# Altium PCB PCB1.PcbDoc
Units mil, origin at the board's own origin, x right, y up, seen from the top; angles counter-clockwise.
Board outline 1560 x 670 mil, 2 copper layers (Top Layer, Bottom Layer); 12 components, 9 nets, 33 pads, 3 vias.
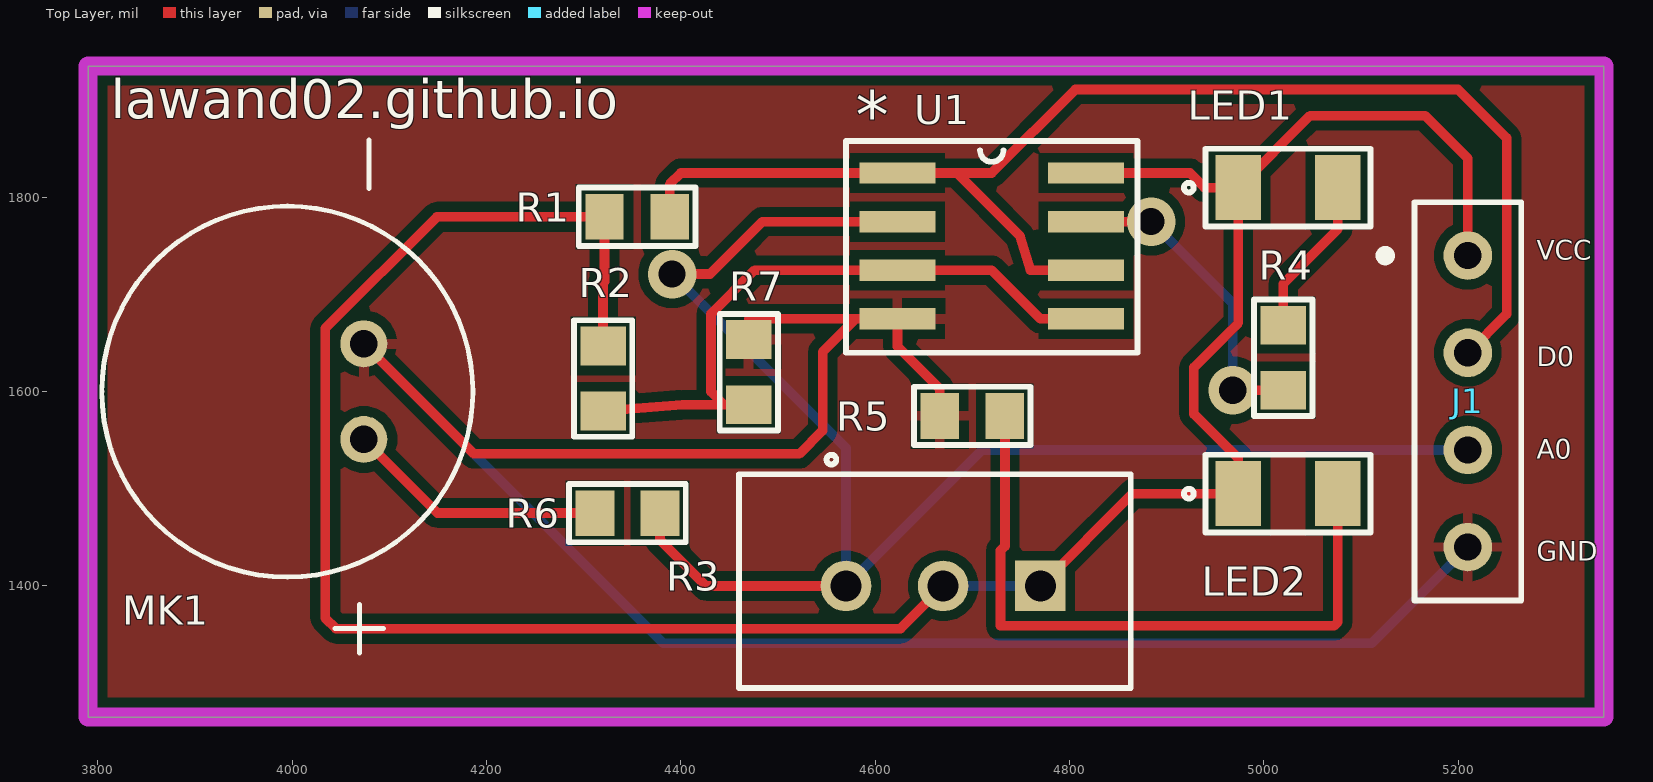
[diagram p0: Top Layer view]
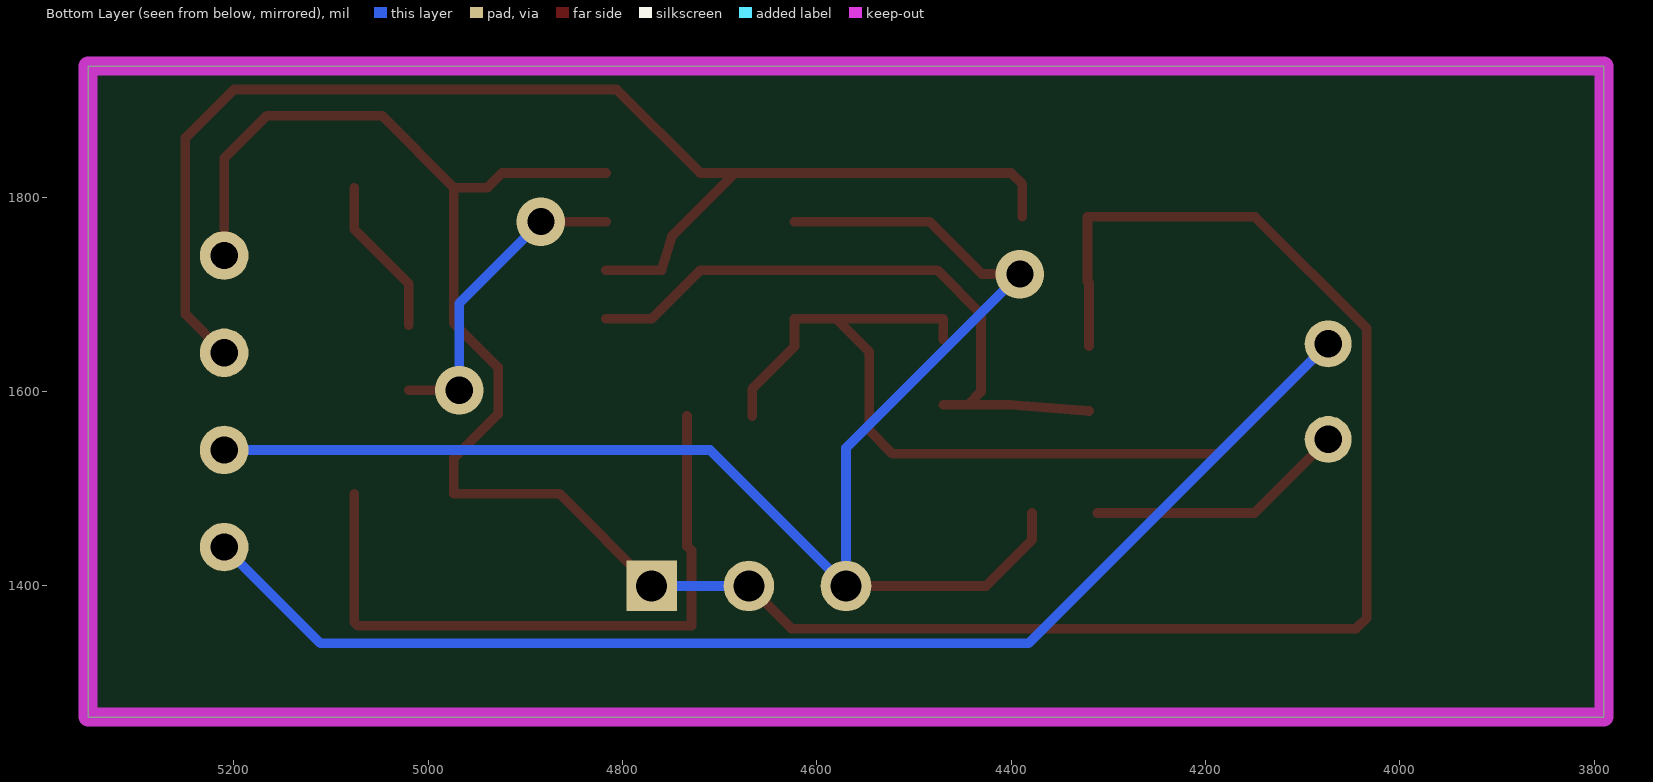
[diagram p1: Bottom Layer view, seen from below]
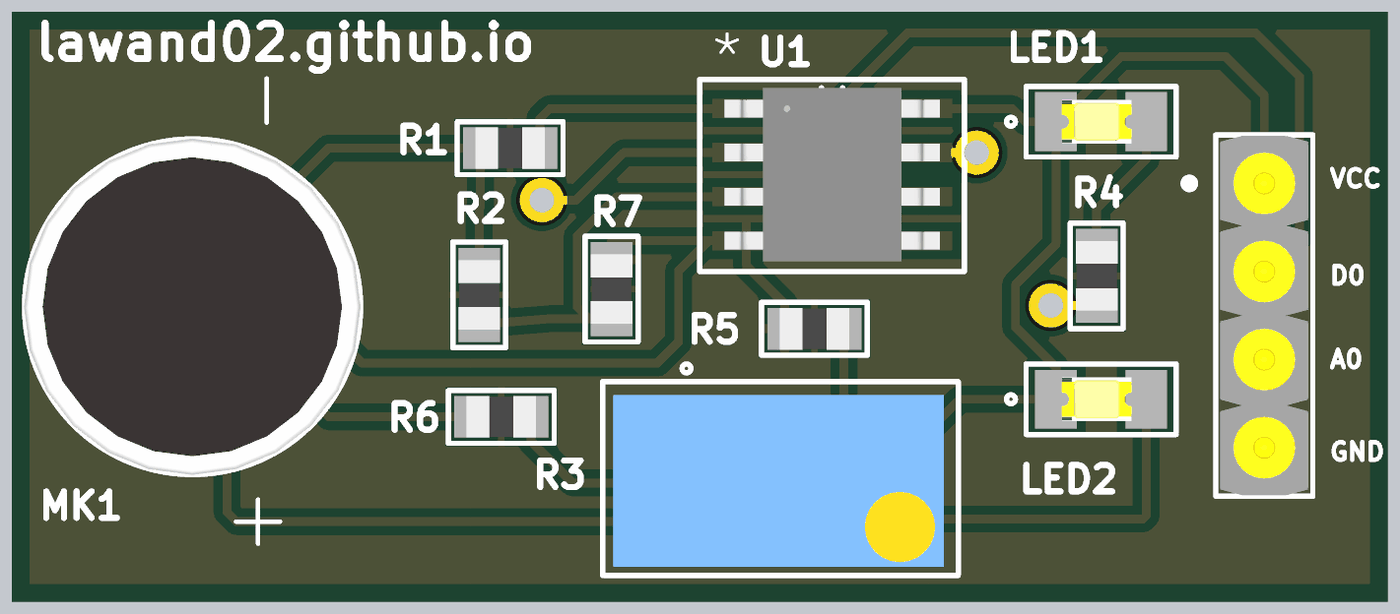
[diagram p2: 3D render of the assembled board from above, using the file's embedded part models]

## Layer stack, top to bottom
Top Solder: solder mask 0.4, Solder Resist, Dk 3.5
Top Layer: signal copper 1.4
Dielectric 1: dielectric 12.6, FR-4, Dk 4.8
Bottom Layer: signal copper 1.4
Bottom Solder: solder mask 0.4, Solder Resist, Dk 3.5

## Board outline
3790,1265 5350,1265 5350,1935 3790,1935

## Design rules (kind name [scope] priority, off if disabled: settings)
Clearance [All] p1: gap=10 ignorepadtopadclearanceinfootprint=FALSE except(0: Arc-Hole Track-Hole SMDPad-Hole THPad-Hole Via-Hole Fill-Hole Poly-Hole Region-Hole Text-Hole)
PolygonConnect [All] p1: connectstyle=Relief reliefconductorwidth=10 reliefentries=4 polygonreliefangle="90 Angle" airgapwidth=10
RoutingVias [All] p1: holewidth=28 width=50 viastyle="Through Hole" minholewidth=28 minwidth=50 maxholewidth=28 maxwidth=50
SolderMaskExpansion [All] p1: expansion=4 istentingtop=FALSE
Width [All] p1: maxlimit=10 minlimit=10 preferedwidth=10
30 further rules are at their usual default settings.

## Components (designator, comment, footprint, x,y, rotation, side; value= is the part's Value field where it differs from the comment)
J1 "TS-104-T-A" TS-104-T-A 5210,1590 r270 top
LED1 "SIG LED" CMD15-21VRD/TR8 5025,1810 r0 top
LED2 "PWR LED" CMD15-21VRD/TR8 5025,1495 r0 top
MK1 "AOM-6738P-R" AOM-6738P-R 3995,1600 r270 top
R1 "10K" ERJ-6GEYJ103V 4355,1780 r180 top
R2 "100K" RC0805JR-07100KL 4320,1613.5 r90 top
R3 "10K" 3296W-1-103LF 4770,1400 r180 top
R4 "10K" ERJ-6GEYJ103V 5020,1635 r90 top
R5 "10K" ERJ-6GEYJ103V 4700,1575 r0 top
R6 "150R" RC0805JR-07150RL 4345,1475 r0 top
R7 "100K" RC0805JR-07100KL 4470,1620 r270 top
U1 "LM393DR" LM393DR 4720,1750 r0 top

## Footprints (in the part's own frame and the unit in brackets; to place one, negate y for a bottom-side part, rotate by r counter-clockwise, add the part's x,y. Pads: shape width x height; smd on the part's side, far side on the other; paste and mask are expansions set on the pad)
3296W-1-103LF [mil]
  round 52 / inner round 60 / far side round 52 hole 32 paste-26 mask+0: 1(200,0) 2(100,0)
  rect 52x52 / inner round 60 / far side rect 52x52 hole 32 paste-26 mask+0: 3(0,0)
  silkscreen extent -93,-135 310,105, body extent -77,-100 298,95, height 378
AOM-6738P-R [mm]
  round 1.228 hole 0.72: N(-1.25,2) P(1.25,2)
  silkscreen extent -6.58,-4.85 6.83,4.85, body extent -4.85,-4.86 4.85,4.84, height 6.97
CMD15-21VRD/TR8 [mil]
  rect 47x67 smd paste+0 mask+0: 1(-51.18,0) 2(51.18,0)
  silkscreen extent -107,-40 85,40, body extent -45,-25 35,25, height 43
ERJ-6GEYJ103V [mm]
  rect 1.006x1.2 smd paste+0 mask+0: 1(-0.853,0) 2(0.853,0)
  silkscreen extent -1.52,-0.76 1.52,0.76, body extent -1,-0.6 1,0.6, height 0.71
LM393DR [mil]
  rect 78x22 smd paste-39 mask-39: 1(-97,75) 2(-97,25) 3(-97,-25) 4(-97,-75) 5(97,-75) 6(97,-25) 7(97,25) 8(97,75)
  silkscreen extent -150,-110 150,108, body extent -122,-99 122,99, height 69
RC0805JR-07100KL [mil]
  rect 40x47 smd paste+0 mask+0: 1(-33.5,0) 2(33.5,0)
  silkscreen extent -60,-30 60,30, body extent -39,-24 39,24, height 28
RC0805JR-07150RL [mil]
  rect 40x47 smd paste+0 mask+0: 1(-33.5,0) 2(33.5,0)
  silkscreen extent -60,-30 60,30, body extent -39,-24 39,24, height 28
TS-104-T-A [mil]
  round 50 / inner round 60 / far side round 50 hole 28 paste-25 mask+0: 1(-150,0) 2(-50,0) 3(50,0) 4(150,0)
  silkscreen extent -205,-90 205,55, body extent -204,-50 204,50, height 327

## Part data
J1: "CONN HEADER VERT 4POS 2.54MM", Mfr_Name="Samtec Inc", RefDes=RefDes, Type=Type
LED1 LED2: library part CMD15-21VRDTR8, "Red LED Indication - Discrete 1.7V 1206 (3216 Metric)", P/N=CMD15-21VRD/TR8
MK1: "30 Hz ~ 15 kHz Analog Microphone Electret Condenser 1.5 V ~ 10 V Omnidirectional (-38dB ±3dB) PC Pins", P/N=AOM-6738P-R
R1 R4 R5: library part ERJ-6GEYJ103V, "10 kOhms ±5% 0.125W, 1/8W Chip Resistor 0805 (2012 Metric) Automotive AEC-Q200 Thick Film", P/N=ERJ-6GEYJ103V
R2 R7: library part RC0805JR-07100KL, "100 kOhms ±5% 0.125W, 1/8W Chip Resistor 0805 (2012 Metric) Moisture Resistant Thick Film", P/N=RC0805JR-07100KL
R3: library part 3296W-1-103LF, "10 kOhms 0.5W, 1/2W PC Pins Through Hole Trimmer Potentiometer Cermet 25.0 Turn Top Adjustment", P/N=3296W-1-103LF
R6: library part RC0805JR-07150RL, "150 Ohms ±5% 0.125W, 1/8W Chip Resistor 0805 (2012 Metric) Moisture Resistant Thick Film", P/N=RC0805JR-07150RL
U1: "IC COMPARATOR 2 DIFF 8SOIC", P/N=LM393DR

## Via types
v1: diameter 50, hole 28, Top Layer to Bottom Layer, 3 vias

## Nets (pads, with @x,y where several pads share a name; then routed paths per layer and width w, separated by ;. In a path a pad name is that pad's centre, name@x,y a point inside that pad or via, vN(x,y) a via of type N, cw(c..) or ccw(c..) an arc to the next point about the centre after c; other vN are vias at no path point)
GND: J1.4 MK1.N R5.1 R7.1 U1.4 | length 2255.6
  Top Layer w10: MK1.N 4186.95,1536 4522,1536 4546,1560 4546,1641 4580,1675 ; R7.1 4470,1675 4580,1675 ; R5.1 4666.43,1603 4623,1646.43 U1.4 4580,1675
  Bottom Layer w10: MK1.N 4381.95,1341 5111,1341 J1.4
NetJ1_1: J1.1 LED1.1 LED2.1 R1.2 R2.2 R3.2 R3.3 U1.8 | length 2669.6
  Top Layer w10: R2.2 4320,1712 4321.43,1713.43 R1.2 4149,1780 4034,1665 4034,1367 4045,1356 4626,1356 R3.2 ; R3.3 4865,1495 LED2.1 4973.82,1531.18 4928,1577 4928,1625.04 4973.82,1670.86 LED1.1 ; U1.8 4924,1825 4939,1810 LED1.1 ; J1.1 5210,1840 5166,1884 5047.82,1884 LED1.1
  Bottom Layer w10: R3.2 R3.3
NetJ1_2: J1.2 R1.1 U1.1 U1.6 | length 1379.2
  Top Layer w10: R1.1 4388.57,1813.57 4400,1825 U1.1 4684,1825 ; U1.6 4760,1725 4749,1760 4684,1825 ; J1.2 5250,1680 5250,1861 5200,1911 4806,1911 4720,1825 4684,1825
NetJ1_3: J1.3 R3.1 R6.2 U1.2 | length 1586.2
  Top Layer w10: R6.2 4378.5,1447.5 4426,1400 R3.1 ; v1(4391,1721) 4430,1721 4484,1775 U1.2
  Bottom Layer w10: v1(4391,1721) 4570,1542 R3.1 4710,1540 J1.3
NetLED1_2: LED1.2 R4.2 | length 164.7
  Top Layer w10: R4.2 5020,1711 5076.18,1767.18 LED1.2
NetLED2_2: LED2.2 R5.2 | length 698.7
  Top Layer w10: R5.2 4733.57,1441 4729,1436.43 4729,1359 5072.18,1359 5076.18,1363 LED2.2
NetMK1_P: MK1.P R6.1 | length 269.2
  Top Layer w10: MK1.P 4149.53,1475 R6.1
NetR2_1: R2.1 R7.2 U1.3 U1.5 | length 674.7
  Top Layer w10: R2.1 4401.5,1586.5 4444.5,1586.5 ; R7.2 4444.5,1586.5 ; U1.5 4770,1675 4720,1725 U1.3 4476,1725 4431,1680 4431,1600 4444.5,1586.5
NetR4_1: R4.1 U1.7 | length 327.4
  Top Layer w10: U1.7 v1(4884,1775) ; v1(4968,1601.43) R4.1
  Bottom Layer w10: v1(4884,1775) 4968,1691 v1(4968,1601.43)

## Polygon pours and split planes (outlines as drawn)
GND on Top Layer "GND_L01_P002" (solid, pour order 2): 3790,1265 5350,1265 5350,1935 3790,1935

## Keep-outs
Keep-Out Layer:
  the board outline again, w19.68

## Silkscreen, mask and mechanical layers (free items; w line width, h text height)
Top Overlay:
  text "lawand02.github.io" at 3813,1881.33 h40
  text "VCC" at 5281,1736 h20
  text "D0" at 5281,1626 h20
  text "A0" at 5281,1531 h20
  text "GND" at 5281,1426 h20

## Text inside footprints (layer, text, board x,y; h text height)
U1: Top Overlay "*" at 4580,1860 h50